# Altium PCB RA3003-A-SY.PcbDoc
Units mm, origin at the board's own origin, x right, y up, seen from the top; angles counter-clockwise.
Board outline 20 x 20 mm, 4 copper layers (Top Layer, GND, Signal Layer, Bottom Layer), stack 0.778 mm thick; 48 components, 30 nets, 129 pads, 32 vias.
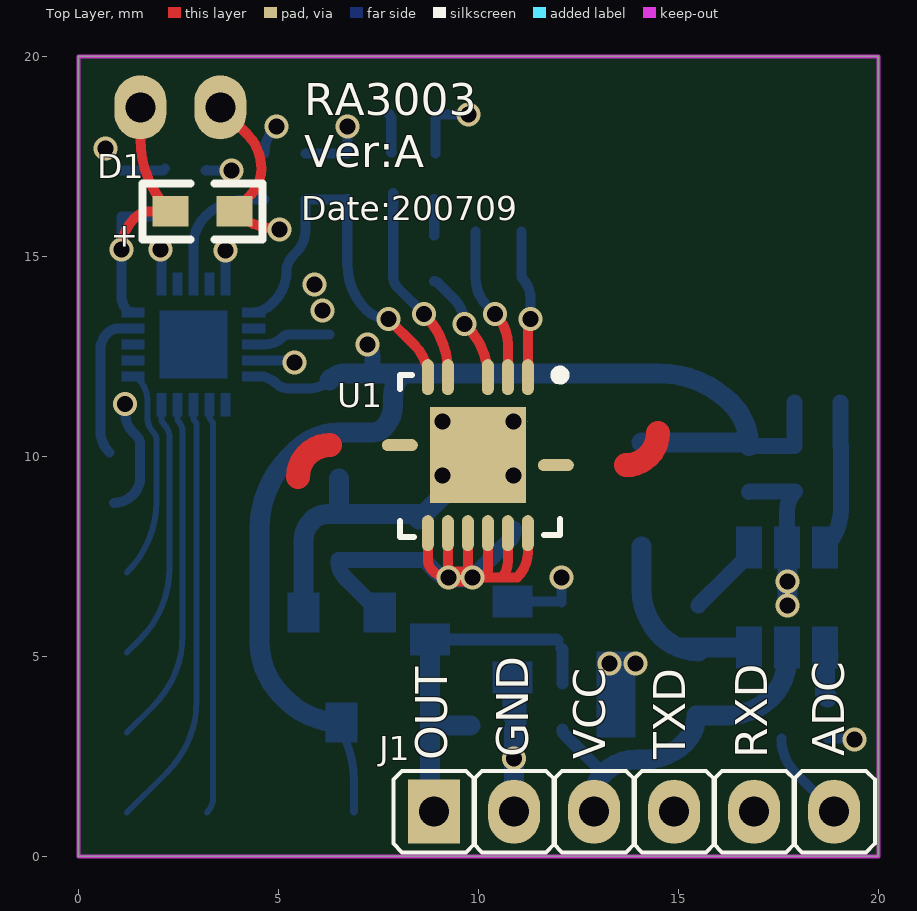
[diagram p0: Top Layer view]
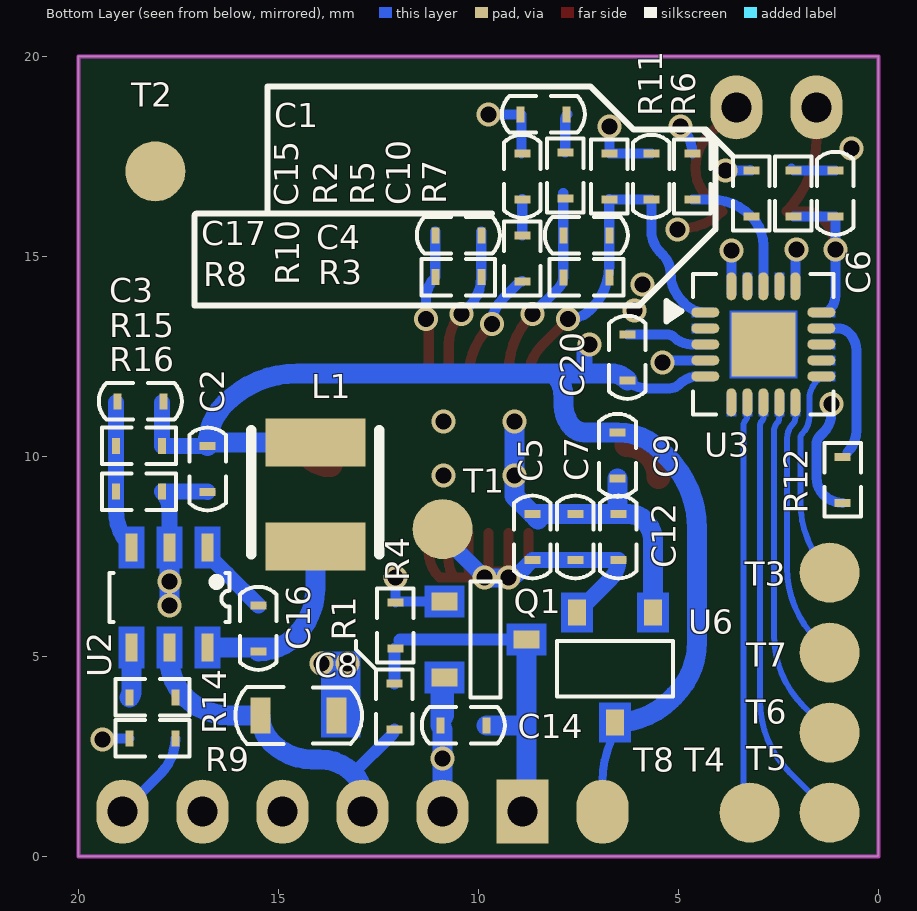
[diagram p1: Bottom Layer view, seen from below]
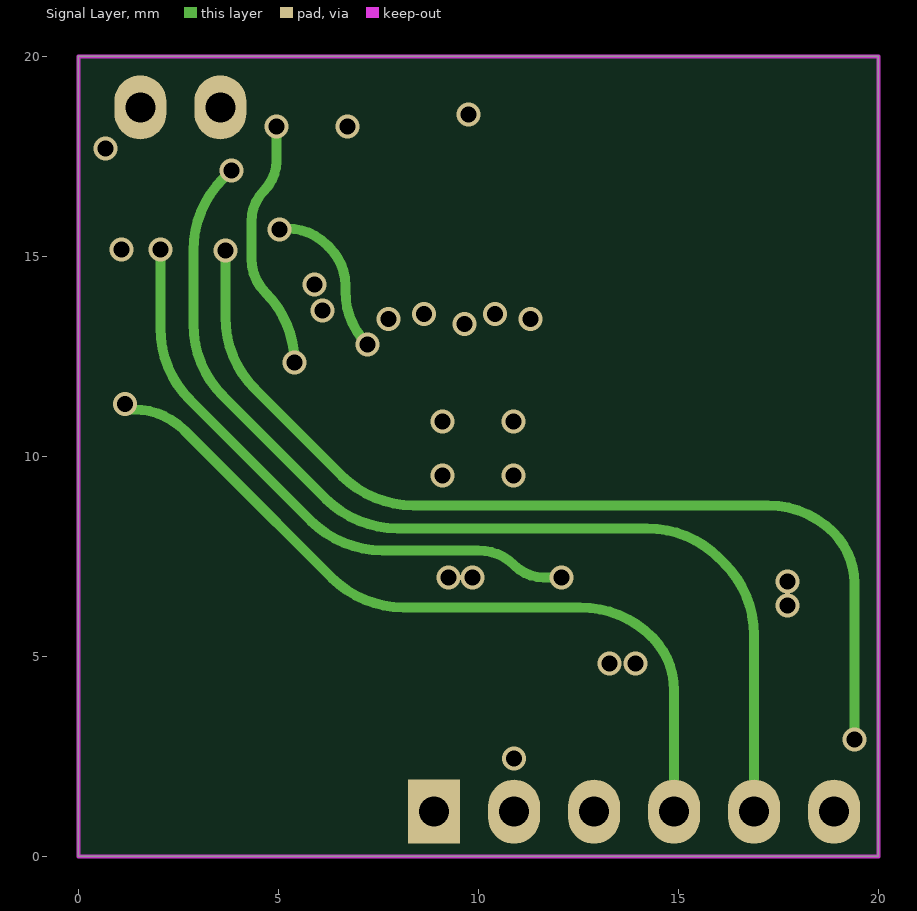
[diagram p2: Signal Layer]

## Layer stack, top to bottom
Top Layer: signal copper 0.0356
Dielectric: core 0.254, FR-4, Dk 4.2
GND: signal copper 0.036
Dielectric: prepreg 0.127, Dk 4.2
Signal Layer: signal copper 0.036
Dielectric: core 0.254, Dk 4.2
Bottom Layer: signal copper 0.0356

## Board outline
0,0 20,0 20,20 0,20

## Design rules (kind name [scope] priority, off if disabled: settings)
Clearance [All] p0: scope1count=1 scope1_0_kind=Board scope1_0_value=Board scope2count=1 scope2_0_kind=Board scope2_0_value=Board commentlength=0 gap=0.18
Clearance InPolygon [All] p0 off: scope1count=1 scope1_0_kind=Board scope1_0_value=Board scope2count=1 scope2_0_kind=Board scope2_0_value=Board commentlength=48 gap=0.2 // Protel DXP Scope 1 Expression Was: InPolygon
Clearance U [All] p0 off: scope1count=1 scope1_0_kind=Board scope1_0_value=Board scope2count=1 scope2_0_kind=Board scope2_0_value=Board commentlength=63 gap=0.15 // Protel DXP Scope 1 Expression Was: (InComponent('U1','U3'))
Clearance Clearance_1 [All] p0 off: scope1count=1 scope1_0_kind=Board scope1_0_value=Board scope2count=1 scope2_0_kind=Board scope2_0_value=Board commentlength=0 gap=0.3
Clearance Clearance_1 [All] p1 off: gap=0.3
Clearance U [(InComponent('U1','U3'))] p2: gap=0.15
Clearance InPolygon [InPolygon] p3: gap=0.2
Clearance [All] p4: gap=0.18
ComponentClearance [All] p0: scope1count=1 scope1_0_kind=Board scope1_0_value=Board scope2count=1 scope2_0_kind=Board scope2_0_value=Board commentlength=0 gap=0.254 collisioncheckmode=3
ComponentClearance [All] p1: gap=0.254 collisioncheckmode=3 verticalgap=0.254
DiffPairsRouting [All] p0: scope1count=1 scope1_0_kind=Board scope1_0_value=Board scope2count=1 scope2_0_kind=Board scope2_0_value=Board commentlength=0
FanoutControl Fanout_BGA [All] p0 off: scope1count=1 scope1_0_kind=Board scope1_0_value=Board scope2count=1 scope2_0_kind=Board scope2_0_value=Board commentlength=69 // Protel DXP Scope 1 Expression Was: IsBGA   Fanout_BGA (Default Rule)
FanoutControl Fanout_LCC [All] p0 off: scope1count=1 scope1_0_kind=Board scope1_0_value=Board scope2count=1 scope2_0_kind=Board scope2_0_value=Board commentlength=69 // Protel DXP Scope 1 Expression Was: IsLCC   Fanout_LCC (Default Rule)
FanoutControl Fanout_SOIC [All] p0 off: scope1count=1 scope1_0_kind=Board scope1_0_value=Board scope2count=1 scope2_0_kind=Board scope2_0_value=Board commentlength=71 // Protel DXP Scope 1 Expression Was: IsSOIC   Fanout_SOIC (Default Rule)
FanoutControl Fanout_Small [All] p0 off: scope1count=1 scope1_0_kind=Board scope1_0_value=Board scope2count=1 scope2_0_kind=Board scope2_0_value=Board commentlength=84 // Protel DXP Scope 1 Expression Was: (CompPinCount < 5)   Fanout_Small (Default Rule)
FanoutControl Fanout_Default [All] p0: scope1count=1 scope1_0_kind=Board scope1_0_value=Board scope2count=1 scope2_0_kind=Board scope2_0_value=Board commentlength=30 // Fanout_Default (Default Rule)
Height [All] p0: scope1count=1 scope1_0_kind=Board scope1_0_value=Board scope2count=1 scope2_0_kind=Board scope2_0_value=Board commentlength=0
HoleSize [All] p0: scope1count=1 scope1_0_kind=Board scope1_0_value=Board scope2count=1 scope2_0_kind=Board scope2_0_value=Board commentlength=0 absolutevalues=TRUE maxlimit=2.54 minlimit=0.025 maxpercent=80.000 minpercent=20.000
LayerPairs [All] p0: scope1count=1 scope1_0_kind=Board scope1_0_value=Board scope2count=1 scope2_0_kind=Board scope2_0_value=Board commentlength=0 enforce=TRUE
PasteMaskExpansion [All] p0: scope1count=1 scope1_0_kind=Board scope1_0_value=Board scope2count=1 scope2_0_kind=Board scope2_0_value=Board commentlength=0 expansion=0
PlaneClearance [All] p0: scope1count=1 scope1_0_kind=Board scope1_0_value=Board scope2count=1 scope2_0_kind=Board scope2_0_value=Board commentlength=0 clearance=0.508
PlaneConnect [All] p0: scope1count=1 scope1_0_kind=Board scope1_0_value=Board scope2count=1 scope2_0_kind=Board scope2_0_value=Board commentlength=0 planeconnectstyle=Direct reliefexpansion=0.508 reliefentries=4 reliefconductorwidth=0.254 reliefairgap=0.254
PlaneConnect [All] p1: planeconnectstyle=Direct reliefexpansion=0.508 reliefentries=4 reliefconductorwidth=0.254 reliefairgap=0.254
PolygonConnect [All] p0: scope1count=1 scope1_0_kind=Board scope1_0_value=Board scope2count=1 scope2_0_kind=Board scope2_0_value=Board commentlength=0 connectstyle=Direct reliefconductorwidth=0.254 reliefentries=4 polygonreliefangle="90 Angle"
PolygonConnect [All] p1: connectstyle=Direct reliefconductorwidth=0.254 reliefentries=4 polygonreliefangle="90 Angle"
RoutingCorners [All] p0: scope1count=1 scope1_0_kind=Board scope1_0_value=Board scope2count=1 scope2_0_kind=Board scope2_0_value=Board commentlength=0 cornerstyle=45-Degree minsetback=2.54 maxsetback=2.54
RoutingLayers [All] p0: scope1count=1 scope1_0_kind=Board scope1_0_value=Board scope2count=1 scope2_0_kind=Board scope2_0_value=Board commentlength=0 top layer=Automatic mid layer 1=Automatic mid layer 2=Automatic bottom layer=Automatic
RoutingPriority [All] p0: scope1count=1 scope1_0_kind=Board scope1_0_value=Board scope2count=1 scope2_0_kind=Board scope2_0_value=Board commentlength=0
RoutingTopology [All] p0: scope1count=1 scope1_0_kind=Board scope1_0_value=Board scope2count=1 scope2_0_kind=Board scope2_0_value=Board commentlength=0 topology=Shortest
RoutingVias [All] p0: scope1count=1 scope1_0_kind=Board scope1_0_value=Board scope2count=1 scope2_0_kind=Board scope2_0_value=Board commentlength=0 holewidth=0.711 width=1.27 viastyle="Through Hole" minholewidth=0.711 minwidth=1.27 maxholewidth=0.711 maxwidth=1.27
RoutingVias [All] p1: holewidth=0.711 width=1.27 viastyle="Through Hole" minholewidth=0.711 minwidth=1.27 maxholewidth=0.711 maxwidth=1.27
ShortCircuit [All] p0: scope1count=1 scope1_0_kind=Board scope1_0_value=Board scope2count=1 scope2_0_kind=Board scope2_0_value=Board commentlength=0 allowed=FALSE
SolderMaskExpansion [All] p0: scope1count=1 scope1_0_kind=Board scope1_0_value=Board scope2count=1 scope2_0_kind=Board scope2_0_value=Board commentlength=0 expansion=0.102
SolderMaskExpansion [All] p1: expansion=0.102
TestPointUsage FabricationTestPointUsage [All] p0: scope1count=1 scope1_0_kind=Board scope1_0_value=Board scope2count=1 scope2_0_kind=Board scope2_0_value=Board commentlength=0 valid=0 allowmultiple=FALSE
TestPointUsage FabricationTestPointUsage [All] p1: valid=0 allowmultiple=FALSE
Testpoint FabricationTestpoint [All] p0: scope1count=1 scope1_0_kind=Board scope1_0_value=Board scope2count=1 scope2_0_kind=Board scope2_0_value=Board commentlength=0 side=3 testpointundercomponent=TRUE minsize=1.016 maxsize=2.54 preferedsize=1.524 minholesize=0 maxholesize=1.016 preferedholesize=0.813 testpointgrid=0.025 style=297 order=0123456789
Testpoint FabricationTestpoint [All] p1: side=3 testpointundercomponent=TRUE minsize=1.016 maxsize=2.54 preferedsize=1.524 minholesize=0 maxholesize=1.016 preferedholesize=0.813 testpointgrid=0.025 style=297 order=0123456789
UnRoutedNet [All] p0: scope1count=1 scope1_0_kind=Board scope1_0_value=Board scope2count=1 scope2_0_kind=Board scope2_0_value=Board commentlength=0
Width [All] p0: scope1count=1 scope1_0_kind=Board scope1_0_value=Board scope2count=1 scope2_0_kind=Board scope2_0_value=Board commentlength=0 maxlimit=1 minlimit=0.15 preferedwidth=0.4
Width [All] p1: maxlimit=1 minlimit=0.15 preferedwidth=0.4
17 further rules are at their usual default settings.

## Components (designator, comment, footprint, x,y, rotation, side; value= is the part's Value field where it differs from the comment)
C1 "4.7uF" C0402 7.8,18.55 r0 bottom
C2 "10uF" C0402 16.769,10.259 r270 bottom
C3 "0.1uF" C0402 19.025,11.375 r180 bottom
C4 "220pF" C0402 6.725,15.525 r0 bottom
C5 "0.5pF" C0402 8.648,7.408 r90 bottom
C6 "0.1uF" C0402 1.075,16 r90 bottom
C7 "0.1uF" C0402 7.575,7.408 r90 bottom
C8 "10uF" C0603 15.425,3.525 r180 bottom
C9 "10uF" C0402 6.52,10.599 r270 bottom
C10 "0.1uF" C0402 5.675,16.425 r90 bottom
C12 "10uF" C0402 6.498,7.408 r90 bottom
C14 "0.1uF" C0402 9.8,3.275 r0 bottom
C15 "1nF" C0402 8.9,17.575 r270 bottom
C16 "0.1uF" C0402 15.5,5.125 r90 bottom
C17 "1nF" C0402 9.925,15.525 r0 bottom
C20 "0.1uF" C0402 6.275,13.05 r270 bottom
D1 "PT19-21C" LED-0603 3.1,16.125 r0 top
J1 "CON6" "CON 6PIN-1-2.0-DIP-P" 8.895,1.115 r0 top
L1 "PRS3015-100MT" PRS3015 14.075,7.65 r90 bottom
Q1 "PDTC114ET" SOT-23(BEC) 10.85,6.375 r180 bottom
R1 "NC" R0402 12.1,3.175 r90 bottom
R2 "2k" R0402 7.825,17.6 r270 bottom
R3 "2M" R0402 6.725,14.475 r0 bottom
R4 "NC" R0402 12.075,6.35 r270 bottom
R5 "47k" R0402 6.725,16.425 r90 bottom
R6 "100k" R0402 2.125,16 r90 bottom
R7 "NC" R0402 4.65,16.425 r90 bottom
R8 "10k" R0402 9.926,14.479 r0 bottom
R9 "1K" R0402 18.725,2.95 r180 bottom
R10 "10k" R0402 8.9,14.375 r90 bottom
R11 "1K" R0402 3.175,16 r90 bottom
R12 "1K" R0402 0.89,9.989 r270 bottom
R14 "47k" R0402 18.725,3.975 r180 bottom
R15 "47k" R0402 19.055,10.259 r180 bottom
R16 "12k" R0402 17.912,9.116 r0 bottom
T1 "" TestPoints#1 10.89,8.179 r180 bottom
T2 "" TestPoints#1 18.075,17.125 r180 bottom
T3 "" TestPoints#2 1.215,7.409 r180 bottom
T4 "" TestPoints#3 1.73,1.095 r180 bottom
T5 "" TestPoints#4 1.215,1.057 r180 bottom
T6 "" TestPoints#5 1.235,3.075 r180 bottom
T7 "" TestPoints#1 1.215,5.095 r180 bottom
T8 "" TestPoints#6 4.34,-2.121 r270 bottom locked
U1 "XBR816" XBR816 6.99,11.529 r270 top
U2 "SY8120B1ABC" SOT-23-6 16.769,7.719 r270 bottom
U3 "HC89S003F4" QFN20(3*3) 2.875,12.8 r180 bottom
U6 "ME6216A12M3G" SOT-23-L 5.63,6.099 r270 bottom
? "" Blueway(1.5*8) 3.95,13.7 r0 top

## Footprints (in the part's own frame and the unit in brackets; to place one, negate y for a bottom-side part, rotate by r counter-clockwise, add the part's x,y. Pads: shape width x height; smd on the part's side, far side on the other; paste and mask are expansions set on the pad)
Blueway(1.5*8) [mm] "Blueway"
C0402 [mm]
  rect 0.2x0.4 smd: 1(0,0) 2(1.15,0)
  silkscreen extent -0.46,-0.46 1.61,0.46
C0603 [mil]
  rect 19.8x35.55 smd: 1(-0.92,0) 2(74,0)
  silkscreen extent -25,-28 99,28
"CON 6PIN-1-2.0-DIP-P" [mm]
  rect 1.3x1.6 hole 0.75: 1(0,0)
  oval 1.3x1.6 hole 0.75: 2(2,0) 3(4,0) 4(6,0) 5(8,0) 6(10,0)
  silkscreen extent -1.02,-1.02 11.02,1.02
LED-0603 [mm]
  rect 0.9x0.762 smd: 1(-0.8,0) 2(0.8,0)
  silkscreen extent -1.5,-0.7 1.5,0.7
PRS3015 [mm]
  rect 1.2x2.5 smd: 1(0.1,0) 2(2.7,0)
  silkscreen extent -0.1,-1.6 3,1.6
QFN20(3*3) [mm]
  rect 1.6x1.6 smd: 0(0,0)
  oval 0.7x0.25 smd: 1(-1.45,0.8) 2(-1.45,0.4) 3(-1.45,0) 4(-1.45,-0.4) 5(-1.45,-0.8) 11(1.45,-0.8) 12(1.45,-0.4) 13(1.45,0) 14(1.45,0.4) 15(1.45,0.8)
  oval 0.25x0.7 smd: 6(-0.8,-1.45) 7(-0.4,-1.45) 8(0,-1.45) 9(0.4,-1.45) 10(0.8,-1.45) 16(0.8,1.45) 17(0.4,1.45) 18(0,1.45) 19(-0.4,1.45) 20(-0.8,1.45)
  Top Layer region: -0.925,-1.219 -0.675,-1.219 -0.675,-1.8 -0.925,-1.8
  Top Layer region: -0.85,0.85 0.85,0.85 0.85,-0.85 -0.85,-0.85
  Top Layer region: -0.525,-1.219 -0.275,-1.219 -0.275,-1.8 -0.525,-1.8
  Top Layer region: -0.125,-1.219 0.125,-1.219 0.125,-1.8 -0.125,-1.8
  Top Layer region: 0.275,-1.219 0.525,-1.219 0.525,-1.8 0.275,-1.8
  Top Layer region: 0.675,-1.219 0.925,-1.219 0.925,-1.8 0.675,-1.8
  Top Layer region: 1.219,-0.925 1.219,-0.675 1.8,-0.675 1.8,-0.925
  Top Layer region: 1.219,-0.525 1.219,-0.275 1.8,-0.275 1.8,-0.525
  Top Layer region: 1.219,-0.125 1.219,0.125 1.8,0.125 1.8,-0.125
  Top Layer region: 1.219,0.275 1.219,0.525 1.8,0.525 1.8,0.275
  Top Layer region: 1.219,0.675 1.219,0.925 1.8,0.925 1.8,0.675
  Top Layer region: 0.925,1.219 0.675,1.219 0.675,1.8 0.925,1.8
  Top Layer region: 0.525,1.219 0.275,1.219 0.275,1.8 0.525,1.8
  Top Layer region: 0.125,1.219 -0.125,1.219 -0.125,1.8 0.125,1.8
  Top Layer region: -0.275,1.219 -0.525,1.219 -0.525,1.8 -0.275,1.8
  Top Layer region: -0.675,1.219 -0.925,1.219 -0.925,1.8 -0.675,1.8
  Top Layer region: -1.219,0.925 -1.219,0.675 -1.8,0.675 -1.8,0.925
  Top Layer region: -1.219,0.525 -1.219,0.275 -1.8,0.275 -1.8,0.525
  Top Layer region: -1.219,0.125 -1.219,-0.125 -1.8,-0.125 -1.8,0.125
  Top Layer region: -1.219,-0.275 -1.219,-0.525 -1.8,-0.525 -1.8,-0.275
  Top Layer region: -1.219,-0.675 -1.219,-0.925 -1.8,-0.925 -1.8,-0.675
  silkscreen extent -2.43,-1.76 1.76,1.76
R0402 [mm]
  rect 0.2x0.4 smd: 1(0,0) 2(1.15,0)
  silkscreen extent -0.35,-0.46 1.5,0.46
SOT-23(BEC) [mm]
  rect 0.65x0.45 smd: B(0,0) C(2.057,-0.95) E(0,-1.9)
  Top Layer region: -0.501,0.401 0.501,0.401 0.501,-0.401 -0.501,-0.401
  Top Layer region: -0.502,-1.503 0.501,-1.503 0.501,-2.306 -0.502,-2.306
  Top Layer region: 1.556,-0.548 2.559,-0.548 2.559,-1.351 1.556,-1.351
  silkscreen extent 0.65,-2.4 1.41,0.5
SOT-23-6 [mm]
  rect 0.7x0.3 smd: 1(0,0) 2(0,-0.95) 3(0,-1.9) 4(2.5,-1.9) 5(2.5,-0.95) 6(2.5,0)
  Top Layer region: -0.526,0.327 0.527,0.327 0.527,-0.326 -0.526,-0.326
  Top Layer region: -0.527,-0.623 0.526,-0.623 0.526,-1.276 -0.527,-1.276
  Top Layer region: -0.527,-1.573 0.526,-1.573 0.526,-2.226 -0.527,-2.226
  Top Layer region: 1.973,0.327 3.026,0.327 3.026,-0.326 1.973,-0.326
  Top Layer region: 1.973,-0.623 3.026,-0.623 3.026,-1.276 1.973,-1.276
  Top Layer region: 1.973,-1.573 3.026,-1.573 3.026,-2.226 1.973,-2.226
  silkscreen extent 0.63,-2.45 1.86,0.54
SOT-23-L [mm]
  rect 0.65x0.45 smd: 1(0,0) 2(0,-1.9) 3(2.757,-0.95)
  Top Layer region: 2.255,-0.549 3.259,-0.549 3.259,-1.352 2.255,-1.352
  Top Layer region: -0.502,-1.503 0.502,-1.503 0.502,-2.307 -0.502,-2.307
  Top Layer region: -0.501,0.401 0.502,0.401 0.502,-0.402 -0.501,-0.402
  silkscreen extent 0.71,-2.4 2.11,0.5
TestPoints#1 [mm] "TestPoints"
  round 1.5 smd: 1(0,0)
TestPoints#2 [mm] "TestPoints"
  round 1.5 smd: 1(0,-0.314)
TestPoints#3 [mm] "TestPoints"
  round 1.5 smd: 1(-1.485,0)
TestPoints#4 [mm] "TestPoints"
  round 1.5 smd: 1(0,0.038)
TestPoints#5 [mm] "TestPoints"
  round 1.5 smd: 1(0.02,0.02)
TestPoints#6 [mm] "TestPoints"
  oval 1.6x1.3 smd: 1(-3.236,-2.555)
XBR816 [mm] "QFN24"
  oval 0.9x0.3 smd: 1(-0.45,4.25) 2(-0.45,3.75) 3(-0.45,3.25) 5(-0.45,2.25) 6(-0.45,1.75) 13(3.45,1.75) 14(3.45,2.25) 15(3.45,2.75) 16(3.45,3.25) 17(3.45,3.75) 18(3.45,4.25)
  oval 0.3x0.9 smd: 10(1.25,1.05) 21(1.75,4.95)
  rect 2.4x2.4 smd: 25(1.5,3)
  silkscreen extent -0.61,1.05 3.55,5.16

## Part data
C1 C2 C3 C4 C5 C6 C7 C8 C9 C10 C12 C14 C15 C16 C17 C20: library part Cap, "Capacitor"
D1: library part "Photo Sen", "Photosensitive Diode"
J1: "Connector"
L1: library part Inductor, "Inductor"
Q1: "三极管"
R1 R2 R3 R4 R5 R6 R7 R8 R9 R10 R11 R12 R14 R15 R16: library part Res2, "Resistor"
T1 T2 T3 T4 T5 T6 T7 T8: library part TestPoints, "TestPoints"
U1: library part XBR1000_24_1
U2: library part H9108
U3: "MCU"
U6: library part SSP6206

## Free pads (board coordinates)
  oval 1.3x1.6 hole 0.75: 2(1.55,18.725) 3(3.55,18.725)

## Via types
v1: diameter 0.6, hole 0.4, Top Layer to Bottom Layer, tented both sides, 32 vias

## Nets (pads, with @x,y where several pads share a name; then routed paths per layer and width w, separated by ;. In a path a pad name is that pad's centre, name@x,y a point inside that pad or via, vN(x,y) a via of type N, cw(c..) or ccw(c..) an arc to the next point about the centre after c; other vN are vias at no path point)
1.2V: C5.1 C7.1 C12.1 T1.1 U1.13 U1.14 U1.15 U1.16 U1.17 U1.18 U6.2 | length 14.4
  Top Layer w0.25: U1.13 8.74,7.416 ccw(c9.116,7.416) 8.85,7.15 8.866,7.134 ccw(c9.25,7.518) v1(9.25,6.975) cw(c9.274,6.999) 9.24,6.999 U1.14 ; U1.15 9.74,7.241 ccw(c10.116,7.241) v1(9.85,6.975) 10.595,6.975 ; 10.175,7.025 ccw(c10.018,7.182) 10.24,7.182 U1.16 ; U1.17 10.74,7.384 cw(c10.091,7.384) 10.595,6.975 ; U1.18 11.24,7.615 cw(c10.335,7.615) 10.975,6.975 10.595,6.975
  Bottom Layer w0.4: U6.2 6.694,6.935 cw(c7.167,7.408) C12.1 C7.1 C5.1 8.961,7.095 ccw(c9.25,7.384) v1(9.25,6.975) ; v1(9.85,6.975) 10.774,7.899 ccw(c10.494,8.179) T1.1
3V: C2.1 C3.2 C9.1 C20.2 D1.2 L1.2 pad.3 R15.2 T8.1 U3.5 U6.3 | length 42.2
  Top Layer w0.25: pad.3 4.221,18.054 cw(c3.368,17.2) 4.575,17.2 cw(c3.609,17.2) 4.292,16.517 D1.2 ccw(c4.926,17.151) 4.926,15.7 4.951,15.675 v1(5.025,15.675)
  Signal Layer w0.25: v1(5.025,15.675) 5.174,15.675 5.199,15.7 cw(c5.199,14.249) 6.225,15.275 6.286,15.214 cw(c5.347,14.275) 6.675,14.275 6.675,14.128 ccw(c8.553,14.128) v1(7.225,12.8)
  Bottom Layer w0.2: U6.3@6.421,3.348 cw(c4.355,1.871) 6.895,1.871 T8.1
  Bottom Layer w0.25: U3.5 4.492,12 cw(c4.492,11.317) 4.975,11.8 ccw(c5.216,12.041) 5.216,11.7 5.792,11.7 ccw(c5.792,12.383) C20.2
  Bottom Layer w0.4: v1(7.225,12.8) cw(c6.923,12.498) 7.35,12.498 7.35,12.075 ; C2.1 R15.2 C3.2@17.905,11.345
  Bottom Layer w0.5: C20.2 cw(c6.697,11.478) 6.697,12.075 7.35,12.075 8.11,12.075 ; U6.3 cw(c6.58,5.31) 6.421,3.348 cw(c6.58,5.31) 5.189,3.918 5.09,4.017 cw(c6.442,5.369) 4.53,5.369 4.53,8.187 cw(c7.07,8.187) 5.274,9.983 5.445,10.154 cw(c6.52,9.078) C9.1 7.35,10.599 ccw(c7.35,11.009) 7.64,10.719 ccw(c7.091,11.268) 7.867,11.268 7.867,11.489 cw(c8.696,11.489) 8.11,12.075 ; L1.2 16.549,10.35 cw(c16.549,10.039) C2.1 ccw(c15.267,10.259) 16.329,11.321 16.319,11.331 ccw(c14.523,9.535) 14.523,12.075 8.11,12.075
+15V: C8.1 J1.3 R1.1 R14.2 U2.5 | length 8.9
  Bottom Layer w0.3: R1.1 ccw(c12.281,3.175) 12.153,3.047 13.125,2.075
  Bottom Layer w0.5: J1.3 12.895,1.52 cw(c13.68,1.52) 13.125,2.075 cw(c13.97,1.23) 13.97,2.425 14.164,2.425 ccw(c14.164,3.84) 15.164,2.839 ccw(c14.479,3.525) C8.1 16.238,3.525 ccw(c16.238,5.06) 17.323,3.975 ccw(c16.367,4.93) 17.719,4.93 U2.5
GND: C1.2 C2.2 C5.2 C6.2 C7.2 C8.2 C9.2 C10.2 C12.2 C14.2 C15.1 C20.1 J1.2 Q1.E R5.2 R6.2 R16.1 T2.1 U1.25 U2.2 U3.3 U6.1 | length 25.5
  Bottom Layer w0.25: C6.2 R6.2 R6.2@2.17,17.195 ; U3.3 4.678,12.8 ccw(c4.678,13.397) 5.1,12.975 cw(c5.281,12.794) 5.281,13.05 C20.1 ; C10.2 R5.2 v1(6.725,18.24) ; C15.1@8.925,17.575 8.925,18.55 C1.2 v1(9.75,18.55)
  Bottom Layer w0.4: 10.81,3.527 Q1.E@10.81,4.478 ; 10.816,3.599 ccw(c11.274,3.599) C14.2 ; C2.2 16.776,9.116 R16.1 ccw(c18.378,8.65) 17.719,8.65 U2.2
  Bottom Layer w0.5: U6.1 5.63,7.878 cw(c6.366,7.878) 5.846,8.399 cw(c6.228,8.016) 6.228,8.558 C12.2 ; C9.2 6.52,8.609 cw(c6.447,8.609) C12.2 ; 8.514,8.424 C5.2 ; v1(9.1,10.875) v1(9.1,9.525) 9.1,9.01 C5.2 ; Q1.E cw(c10.609,4.234) 10.95,4.234 C14.2 ccw(c11.083,3.142) 10.895,3.142 J1.2 ; C8.2 13.545,4.704 cw(c13.646,4.704) 13.575,4.775 ; U2.2 17.725,7.713 v1(17.725,6.275) ; C12.2 C7.2 C5.2
  other v1: 10.895,2.45 13.275,4.825 13.925,4.825 17.725,6.875 10.875,9.525 10.875,10.875 6.1,13.65 5.9,14.3 0.675,17.7
LIGHT_CHECK: C6.1 D1.1 pad.2 R6.1 U3.15 | length 8.3
  Top Layer w0.25: v1(1.075,15.175) cw(c2.161,15.175) 1.393,15.943 1.4,15.95 cw(c1.822,15.528) 1.822,16.125 D1.1 2.294,16.131 cw(c4.09,17.927) 1.55,17.927 pad.2
  Bottom Layer w0.25: U3.15 cw(c1.425,14.204) 1.237,13.63 cw(c1.628,14.021) 1.075,14.021 v1(1.075,15.175) C6.1 R6.1
NetC1_1: C1.1 R2.1 | length 1
  Bottom Layer w0.254: C1.1@7.775,18.55 cw(c7.654,18.429) 7.825,18.429 R2.1
NetC3_1: C3.1 R15.1 R16.2 U2.3 | length 3.7
  Bottom Layer w0.4: U2.3 ccw(c17.719,8.669) 19.062,8.669 R16.2 19.062,10.252 R15.1 C3.1@19.055,11.345
NetC4_1: C4.1 C10.1 R3.1 R5.1 U1.6 U3.1 | length 9.8
  Top Layer w0.254: v1(7.752,13.434) 8.41,12.776 cw(c7.613,11.979) U1.6
  Bottom Layer w0.25: U3.1 ccw(c4.325,14.324) 4.837,13.812 4.899,13.874 ccw(c4.174,14.6) 5.2,14.6 cw(c5.804,14.6) 5.377,15.027 5.445,15.095 ccw(c4.89,15.65) 5.675,15.65 C10.1 R5.1
  Bottom Layer w0.254: R5.1 C4.1 6.725,14.801 ccw(c8.332,14.801) 7.196,13.664 ccw(c7.752,14.221) v1(7.752,13.434)
NetC4_2: C4.2 R2.2 R3.2 U1.5 | length 5.1
  Top Layer w0.254: v1(8.641,13.561) cw(c7.195,12.115) 9.24,12.115 U1.5
  Bottom Layer w0.254: 7.875,16.575 C4.2 R3.2 ccw(c8.232,14.475) 7.98,14.222 v1(8.641,13.561)
NetC14_1: C14.1 J1.1 Q1.C R1.2 R4.2 | length 9.9
  Bottom Layer w0.3: Q1.C 11.915,5.425 cw(c11.915,5.34) 11.975,5.4 ; R4.2 cw(c12.015,5.14) 12.1,5.14 R1.2
  Bottom Layer w0.5: Q1.C 8.793,1.217 J1.1 J1.1@8.895,1.656 ; 8.818,3.275 C14.1
NetC15_2: C15.2 R10.2 | length 0.9
  Bottom Layer w0.254: R10.2 C15.2
NetC16_1: C16.1 L1.1 U2.6 | length 5.2
  Bottom Layer w0.5: L1.1 14.075,6.692 ccw(c15.742,6.692) 14.563,5.513 ccw(c15.5,6.45) 15.01,5.219 ccw(c15.5,6.45) C16.1 ; 15.01,5.219 U2.6
NetC16_2: C16.2 U2.1 | length 2
  Bottom Layer w0.4: C16.2 16.283,7.058 16.645,7.42 ccw(c16.347,7.719) U2.1
NetC17_1: C17.1 R8.1 U1.2 | length 3.9
  Top Layer w0.254: v1(10.419,13.561) cw(c9.644,12.786) 10.74,12.786 U1.2
  Bottom Layer w0.254: C17.1@9.926,15.622 R8.1 ccw(c10.953,14.479) 10.227,13.753 v1(10.419,13.561)
NetC17_2: C17.2 R8.2 U1.1 | length 3.7
  Top Layer w0.254: U1.1 11.24,13.27 cw(c11.472,13.27) v1(11.308,13.434)
  Bottom Layer w0.254: C17.2@11.076,15.622 R8.2 cw(c10.516,13.919) 11.308,13.919 v1(11.308,13.434)
NetJ1_4: J1.4 R12.2 | length 22.8
  Signal Layer w0.25: v1(1.17,11.309) 1.304,11.175 1.386,11.175 cw(c1.386,9.391) 2.647,10.653 ; 2.647,10.653 3.625,9.675 6.331,6.969 ccw(c8.127,8.765) 8.127,6.225 12.548,6.225 cw(c12.548,3.685) 14.344,5.481 cw(c13.014,4.151) 14.895,4.151 J1.4
  Bottom Layer w0.25: R12.2 ccw(c0.89,9.515) 1.368,9.037 ccw(c0.938,9.467) 1.546,9.467 1.546,10.291 ccw(c1.228,10.291) 1.453,10.516 1.367,10.602 cw(c1.842,11.077) 1.17,11.077 v1(1.17,11.309)
NetJ1_5: J1.5 R11.2 | length 27.2
  Signal Layer w0.25: v1(3.825,17.15) 3.619,16.944 ccw(c5.415,15.148) 2.875,15.148 2.875,13.302 ccw(c5.415,13.302) 3.619,11.506 6.181,8.944 ccw(c7.977,10.74) 7.977,8.2 14.223,8.2 cw(c14.223,5.66) 16.019,7.456 16.151,7.324 cw(c14.355,5.528) 16.895,5.528 J1.5
  Bottom Layer w0.25: R11.2 R11.2@3.2,17.15 ; R11.2@3.207,17.152 R11.2@3.205,17.15 ; v1(3.825,17.15) R11.2@3.205,17.15 ; R11.2@3.2,17.15 3.202,17.148 R11.2@3.205,17.15 ; R11.2@3.2,17.15 R11.2@3.205,17.15
NetJ1_6: J1.6 R9.2 | length 2.3
  Bottom Layer w0.25: R9.2 ccw(c18.818,2.95) 17.939,2.071 J1.6
NetQ1_B: Q1.B R4.1 U3.16 | length 17.7
  Signal Layer w0.25: v1(2.05,15.175) 2.05,13.202 ccw(c4.59,13.202) 2.794,11.406 5.806,8.394 ccw(c7.602,10.19) 7.602,7.65 9.995,7.65 cw(c9.995,6.37) 10.9,7.275 ccw(c11.624,7.999) 11.624,6.975 v1(12.075,6.975)
  Bottom Layer w0.25: v1(2.05,15.175) cw(c1.99,15.115) 2.075,15.115 U3.16 ; Q1.B 12.015,6.375 cw(c12.015,6.29) R4.1 v1(12.075,6.975)
NetR7_1: R7.1 R11.1 U3.18 | length 3.4
  Bottom Layer w0.25: U3.18 2.875,15.276 cw(c3.899,15.276) R11.1 cw(c4.201,14.974) 4.201,16.425 R7.1
NetR7_2: R7.2 U3.4 | length 8.2
  Signal Layer w0.25: v1(4.95,18.25) 4.95,17.374 cw(c3.926,17.374) 4.65,16.65 ccw(c5.435,15.865) 4.325,15.865 4.325,14.945 ccw(c5.521,14.945) 4.675,14.1 cw(c2.925,12.35) v1(5.4,12.35)
  Bottom Layer w0.25: U3.4 5.279,12.4 cw(c5.279,12.229) v1(5.4,12.35) ; R7.2 cw(c5.555,17.575) 4.915,18.215 v1(4.95,18.25)
NetR9_1: R9.1 U3.20 | length 26.3
  Signal Layer w0.25: v1(3.675,15.15) 3.675,13.477 ccw(c6.215,13.477) 4.419,11.681 6.581,9.519 ccw(c8.377,11.315) 8.377,8.775 17.245,8.775 cw(c17.245,6.47) 18.875,8.1 cw(c17.608,6.833) 19.4,6.833 v1(19.4,2.925) v1@19.4,2.9
  Bottom Layer w0.25: U3.20 v1(3.675,15.15) ; R9.1 19.34,2.95 cw(c19.34,2.865) v1(19.4,2.925)
NetR10_1: R10.1 U1.3 | length 2.9
  Top Layer w0.254: v1(9.657,13.307) 9.713,13.251 cw(c8.441,11.979) U1.3
  Bottom Layer w0.254: R10.1 cw(c8.9,14.254) 8.985,14.34 9.402,13.923 cw(c8.785,13.307) v1(9.657,13.307)
NetR12_1: R12.1 U3.14 | length 3.8
  Bottom Layer w0.25: 0.775,10.1 cw(c1.318,10.643) 0.55,10.643 0.55,12.653 cw(c1.147,12.653) 0.725,13.075 cw(c1.027,12.773) 1.027,13.2 U3.14
NetR14_1: R14.1 U2.4 | length 1.5
  Bottom Layer w0.5: U2.4 cw(c18.472,5.022) U2.4@18.75,5.022 ; U2.4 18.669,4.111 ccw(c18.861,4.111) R14.1
NetT3_1: T3.1 U3.11 | length 5.3
  Bottom Layer w0.15: T3.1 ccw(c-0.559,8.869) 1.95,8.869 1.95,10.448 ccw(c1.779,10.448) 1.9,10.569 cw(c2.322,10.991) 1.725,10.991 1.725,11.419 ccw(c1.047,11.419) 1.526,11.899 U3.11
NetT4_1: T4.1 U3.7 | length 10.4
  Bottom Layer w0.15: T4.1 ccw(c2.841,1.469) 3.37,1.469 3.37,10.778 ccw(c3.199,10.778) 3.32,10.899 cw(c3.428,11.007) 3.275,11.007 U3.7 U3.7@3.32,11.305
NetT5_1: T5.1 U3.8 | length 10.9
  Bottom Layer w0.15: T5.1 2.216,2.096 ccw(c0.42,3.892) 2.96,3.892 2.96,10.754 ccw(c2.755,10.754) 2.9,10.899 cw(c2.96,10.959) 2.875,10.959 U3.8
NetT6_1: T6.1 U3.9 | length 8.8
  Bottom Layer w0.15: T6.1 1.866,3.746 ccw(c0.07,5.542) 2.61,5.542 2.61,10.606 ccw(c2.231,10.606) 2.499,10.874 cw(c2.735,10.983) 2.475,10.983 U3.9
NetT7_1: T7.1 U3.10 | length 6.6
  Bottom Layer w0.15: T7.1 1.536,5.416 ccw(c-0.26,7.212) 2.28,7.212 2.28,10.463 ccw(c1.792,10.463) 2.157,10.787 ccw(c1.792,10.463) 2.137,10.808 cw(c2.287,10.958) 2.075,10.958 U3.10
pads on no net: U1.10 U1.21 U3.0 U3.2 U3.6 U3.12 U3.13 U3.17 U3.19
copper on no net: | length 2.5
  Top Layer w0.6: 5.49,9.479 cw(c6.29,9.479) 6.29,10.279 ; 13.69,9.779 ccw(c13.69,10.579) 14.49,10.579

## Polygon pours and split planes (outlines as drawn)
GND on GND "Bottom Layer-No Net" (solid, remove dead copper, pour order 18): 0,20 0,0 20,0 20,20
GND on Signal Layer "Bottom Layer-No Net" (solid, remove dead copper, pour order 16): 0,20 0,0 20,0 20,20
GND on Bottom Layer "Bottom Layer-No Net" (solid, remove dead copper, pour order 14): 0,20 0,0 20,0 20,20

## Keep-outs
Keep-Out Layer:
  the board outline again, w0.1

## Other copper
Top Layer:
  rectangle net 1.2V: 9.24,6.75 9.825,7.241
Bottom Layer:
  rectangle net GND: 12.95,2.975 13.928,5.125
  rectangle net 1.2V: 9.2,6.725 9.9,7.2

## Silkscreen, mask and mechanical layers (free items; w line width, h text height)
Top Overlay:
  text "RA3003" at 5.65,18.525 h0.8
  text "Ver:A" at 5.65,17.225 h0.8
  text "Date:200709" at 5.575,15.9 h0.6
  text "ADC" at 19.15,2.5 h0.8 r90
  text "GND" at 11.25,2.475 h0.8 r90
  text "RXD" at 17.225,2.45 h0.8 r90
  text "VCC" at 13.175,2.425 h0.8 r90
  text "TXD" at 15.175,2.425 h0.8 r90
  text "OUT" at 9.225,2.4 h0.8 r90
Bottom Overlay:
  lines w0.1: 12.557,4.674 13.06,5.176 13.06,5.389
  lines w0.15: 3.632,17.499 4.309,18.175 4.4,18.175 ; 9.653,16.075 15.275,16.075 ; 4.4,18.175 4.075,17.85 4.075,15.675 5.975,13.775 17.1,13.775 17.1,16.025 17.05,16.075 15.275,16.075 ; 4.4,18.175 6.125,18.175 7.2,19.25 15.275,19.25 15.275,16.075
Top Solder:
  lines w0.6: 5.49,9.479 cw(c6.29,9.479) 6.29,10.279 ; 13.69,9.779 ccw(c13.69,10.579) 14.49,10.579

## Text inside footprints (layer, text, board x,y; h text height)
D1: Top Overlay "+" at 0.814,15.236 h0.6